# EAGLE board EasyAudiobookPlayer (EAGLE 7.7.0)
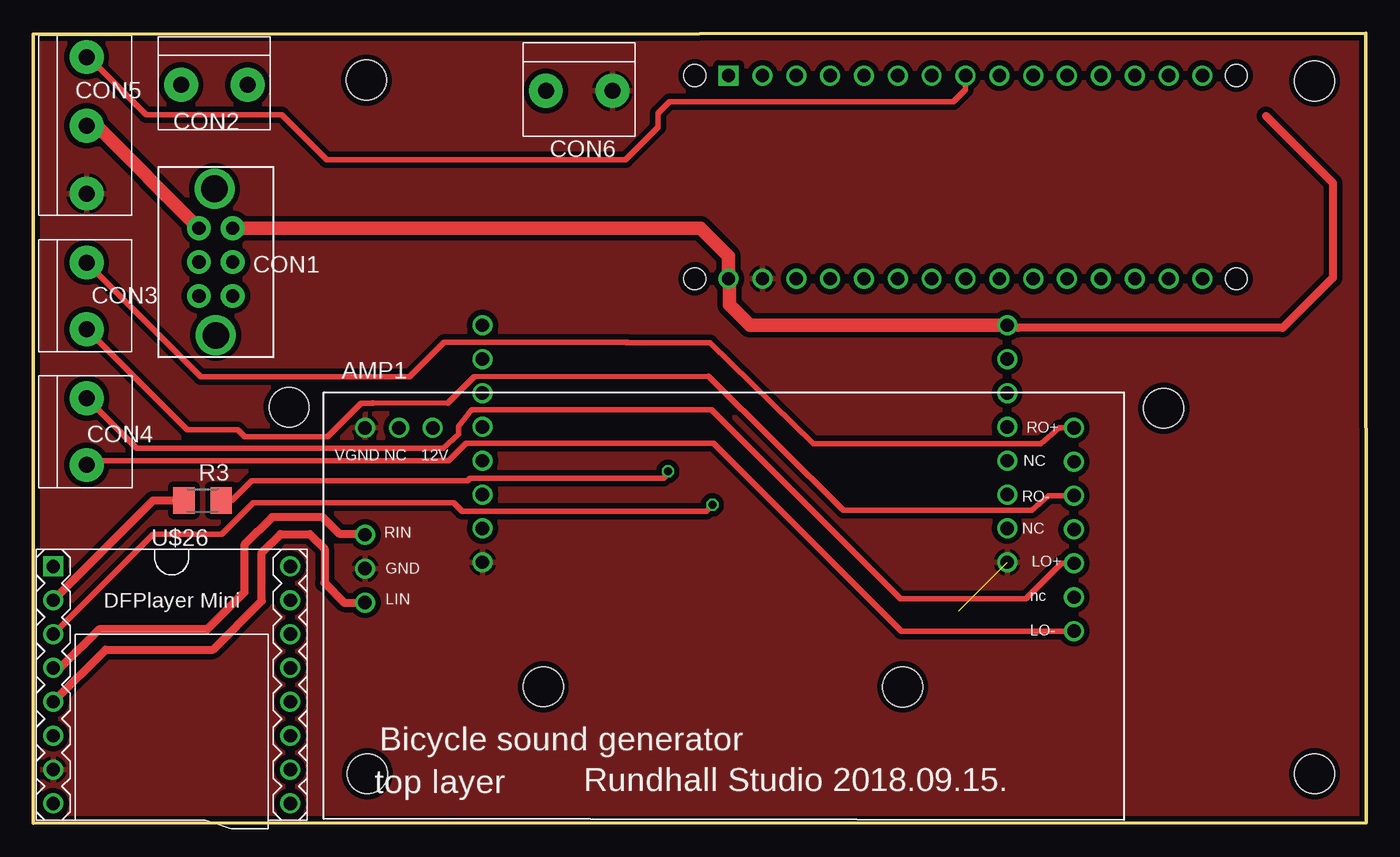
[diagram p0: board, top side]
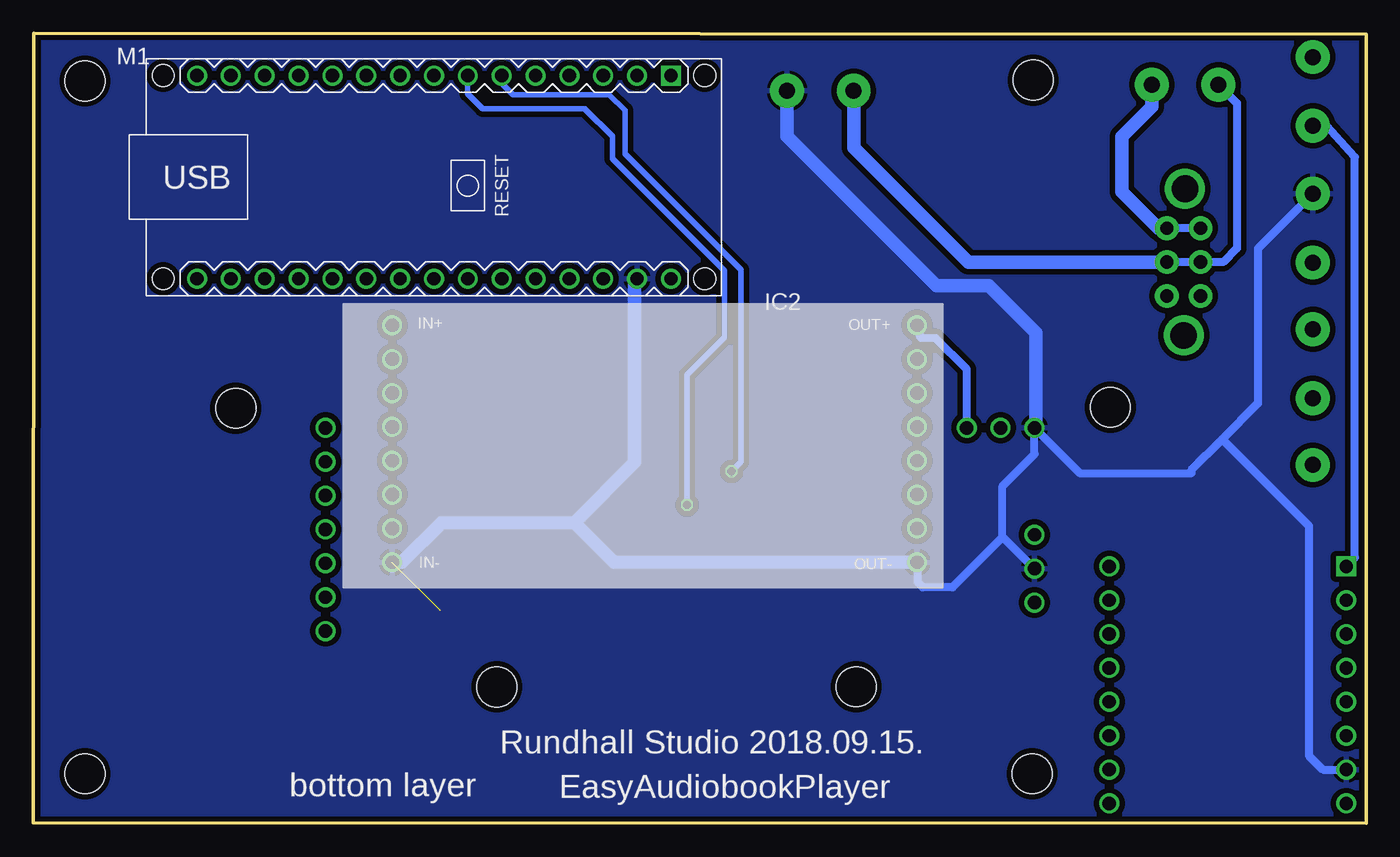
[diagram p1: board, bottom side, seen from below]

Size 100.02 x 59.26 mm. Coordinates in mm from the lower left corner, seen from the top.
Outline: 100.02,0.05 0,0 0.01,59.19 99.98,59.26 100.02,0.05
Copper layers (1*2*15*16): Top 0.035mm / dielectric 0.2mm / Route2 0.0175mm / dielectric 0.3mm / Route15 0.0175mm / dielectric 0.2mm / Bottom 0.035mm
Design rules "SeeedStudio_4layer_DRU_no_angle_20140221": minimum track width 8mil, minimum drill 12mil, track to track 8mil, track to pad 8mil, pad to pad 8mil, via to via 8mil, smd to smd 0mil, copper to edge 10mil, drill to drill 8mil, minimum pad ring 6mil, minimum via ring 4mil, stop-mask expansion 4mil, vias tented up to drill 25mil, thermal gap 10mil
Net classes: 0 default: width 0.203 mm, drill 0.406 mm, clearance 0.203 mm; 1 power: width 0.61 mm, drill 0.711 mm, clearance 0.203 mm; 2 gnd: width 0.305 mm, drill 0.711 mm, clearance 0.203 mm; 3 usbvcc: width 0.508 mm, drill 0.711 mm, clearance 0.203 mm
Holes 3 mm at 19.19,31.21 24.99,55.75 84.82,31.13 96.13,55.68 38.27,10.25 65.24,10.23 96.13,55.68 96.13,3.71 25.07,3.71

## Footprints (pad centres in the part's own frame; a part is rotated, then mirrored left to right if it is on the bottom)
AMPLIFIER_BOARD_80W = drill 1: 12V 40.73,-14.64; GND 45.81,-4.08; LIN 45.81,-1.54; LO+ -7.39,-4.48; LO- -7.39,0.6; NC1 -7.39,-12.1; NC2 -7.39,-7.02; NC3 -7.39,-1.94; NC4 43.27,-14.64; RIN 45.81,-6.62; RO+ -7.39,-14.64; RO- -7.39,-9.56; VGND 45.81,-14.64
SS-22F04_MINI_SLIDE_SWITCH = drill 1 pad 1.778: I1_1 -1.27,0; I2_1 1.27,0; O1_2 -1.27,2.54; O1_3 -1.27,-2.54; O2_2 1.27,2.54; O2_3 1.27,-2.54 | drill 2: P$7 -0.1,5.5; P$8 0,-5.5
1X2_5MM_TERMINAL_BLOCK = drill 1.2 pad 2.54: 1 3.3,0; 2 -1.7,0
1X3_5MM_TERMINAL_BLOCK = drill 1.2 pad 2.54: 1 -4.32,0; 2 0.84,0; 3 5.92,0
XL6009_STEP_UP_CONVERTER_MODULE = drill 1: IN+ -20.32,7.62; IN- -20.32,-10.16; N1 -20.32,5.08; N2 -20.32,2.54; N3 -20.32,0; N4 -20.32,-2.54; N5 -20.32,-5.08; N6 -20.32,-7.62; N7 19.05,5.08; N8 19.05,2.54; N9 19.05,0; N10 19.05,-2.54; N11 19.05,-5.08; N12 19.05,-7.62; OUT+ 19.05,7.62; OUT- 19.05,-10.16
ARDUINO-NANO-3.0 = drill 1 square: J1.1 17.78,7.62 | drill 1: J1.2 15.24,7.62; J1.3 12.7,7.62; J1.4 10.16,7.62; J1.5 7.62,7.62; J1.6 5.08,7.62; J1.7 2.54,7.62; J1.8 0,7.62; J1.9 -2.54,7.62; J1.10 -5.08,7.62; J1.11 -7.62,7.62; J1.12 -10.16,7.62; J1.13 -12.7,7.62; J1.14 -15.24,7.62; J1.15 -17.78,7.62; J2.1 17.78,-7.62; J2.2 15.24,-7.62; J2.3 12.7,-7.62; J2.4 10.16,-7.62; J2.5 7.62,-7.62; J2.6 5.08,-7.62; J2.7 2.54,-7.62; J2.8 0,-7.62; J2.9 -2.54,-7.62; J2.10 -5.08,-7.62; J2.11 -7.62,-7.62; J2.12 -10.16,-7.62; J2.13 -12.7,-7.62; J2.14 -15.24,-7.62; J2.15 -17.78,-7.62 | hole 1.651: -20.32,7.62; -20.32,-7.62; 20.32,-7.62; 20.32,7.62
M1206 = smd 1.6 x 2: 1 -1.4,0; 2 1.4,0
DFPLAYER-MINI-MODULE = drill 1 square: 1 -8.89,-8.89 | drill 1: 2 -6.35,-8.89; 3 -3.81,-8.89; 4 -1.27,-8.89; 5 1.27,-8.89; 6 3.81,-8.89; 7 6.35,-8.89; 8 8.89,-8.89; 9 8.89,8.89; 10 6.35,8.89; 11 3.81,8.89; 12 1.27,8.89; 13 -1.27,8.89; 14 -3.81,8.89; 15 -6.35,8.89; 16 -8.89,8.89

## Placement (x,y rotation side)
AMP1  AMPLIFIER_BOARD_80W  [AMPLIFIER_BOARD_80W]  70.7,15.02 180 top
CON1  SS-22F04_MINI_SLIDE_SWITCH  [SS-22F04_MINI_SLIDE_SWITCH]  13.69,42.1 0 top
CON2  [1X2_5MM_TERMINAL_BLOCK]  14.39,55.41 180 top
CON3  [1X2_5MM_TERMINAL_BLOCK]  3.99,40.36 270 top
CON4  [1X2_5MM_TERMINAL_BLOCK]  4,30.18 270 top
CON5  [1X3_5MM_TERMINAL_BLOCK]  4,53.16 270 top
CON6  [1X2_5MM_TERMINAL_BLOCK]  41.76,54.94 180 top
IC2  [XL6009_STEP_UP_CONVERTER_MODULE]  52.76,29.74 0 bottom
M1  ARDUINO-NANO-3.0  [ARDUINO-NANO-3.0]  69.95,48.47 0 bottom
R3  1kohm  [M1206]  12.7,24.22 180 top
U$26  DFPLAYER-MINI-MODULE  [DFPLAYER-MINI-MODULE]  10.39,10.38 270 top

## Library data of the parts
AMP1 CON1-CON6 IC2 = custom_petranyi
M1 U$26 = diy-modules
R3 = rcl

## Nets
3V3: M1.J2.14
5V: M1.J2.4
+5V [usbvcc]: CON1.O1_2 CON1.O2_2 CON2.2 CON5.2 IC2.IN+ M1.J2.1 U$26.1
+12V [usbvcc]: AMP1.12V IC2.OUT+
GND [gnd]: AMP1.GND AMP1.VGND CON5.3 CON6.2 IC2.IN- IC2.OUT- M1.J2.2 U$26.7
GND.1: M1.J1.4
GND.2: U$26.10
N$3: CON1.I1_1 CON1.I2_1 CON2.1 CON6.1
N$5: AMP1.RO+ CON3.2
N$6: AMP1.RO- CON3.1
N$7: AMP1.LO+ CON4.2
N$8: AMP1.LO- CON4.1
N$9: M1.J1.6 R3.1
N$10: R3.2 U$26.2
N$11: M1.J1.7 U$26.3
N$12: AMP1.RIN U$26.4
N$13: AMP1.LIN U$26.5
N$14: CON5.1 M1.J1.8

## Tracks (layer width: path | path; a pad name or v marks a point on that pad's centre or on a via)
+5V
  Top 0.61: 92.5,53.04 97.51,48.03 97.51,40.92 93.75,37.16 73.88,37.16 IC2.IN+
  Top 1.016: CON5.2 4.74,52.32 CON1.O1_2 | CON1.O2_2 50.05,44.64 52.15,42.55 52.15,40.87 M1.J2.1 52.22,40.8 52.22,38.91 53.78,37.35 IC2.IN+
  Bottom 0.61: U$26.1 0.84,19.93 0.84,49.99 2.94,52.32 CON5.2 | CON1.O1_2 CON1.O2_2
  Bottom 1.016: CON2.2 16.09,53.76 18.34,51.51 18.34,47.38 15.6,44.64 CON1.O2_2
+12V
  Bottom 0.61: AMP1.12V 29.97,34.06 32.31,36.4 33.41,36.4 IC2.OUT+
GND  (1 unrouted)
  Bottom 0.406: AMP1.GND 25.34,19.55
  Bottom 0.61: U$26.7 3.24,4.03 4.29,5.08 4.29,22.32 4.31,22.32 10.81,28.82 | AMP1.GND 27.28,21.49 | 27.28,21.49 27.28,25.3 24.89,27.69 AMP1.VGND 21.49,26.26 13.11,26.26 13.11,26.52 10.81,28.82 | CON5.3 8.13,43.11 8.13,31.5 10.81,28.82 | 34.19,19.57 IC2.OUT- 33.66,19.52 33.66,18.09 33.27,17.7 31.04,17.7 27.28,21.46 27.28,21.49
  Bottom 1.016: CON6.2 43.46,51.53 32.26,40.34 28.32,40.34 24.79,36.8 24.79,29.76 AMP1.VGND | IC2.IN- 72.37,19.57 69.39,22.55 59.41,22.55 | 59.41,22.55 54.89,27.08 54.89,40.67 M1.J2.2 | 34.19,19.57 56.43,19.57 59.41,22.55
  pour Bottom (isolate 0.406): 0.49,58.56 99.56,58.77 99.39,0.45 0.57,0.52
  pour Top (isolate 0.406): 99.56,58.77 99.87,0.42 0.57,0.52 0.49,58.56
N$3
  Bottom 0.61: CON2.1 9.7,54.02 9.7,43.13 10.73,42.1 CON1.I1_1 CON1.I2_1
  Bottom 1.016: CON1.I2_1 29.86,42.1 38.43,50.67 38.43,54.91 CON6.1
N$5
  Top 0.406: CON3.2 12.55,33.5 28.22,33.5 30.81,36.09 44.45,36.09 | 44.45,36.09 44.6,36.09 | AMP1.RO+ 77.01,29.66 75.62,28.47 58.55,28.47 50.77,36.04 44.5,36.04 44.45,36.09
N$6
  Top 0.406: CON3.1 11.54,29.52 15.34,29.52 15.85,29.01 22.1,29.01 24.61,31.52 25.45,31.52 25.48,31.55 31.09,31.52 33.07,33.5 50.65,33.53 60.78,23.47 74.93,23.47 76.17,24.58 AMP1.RO-
N$7
  Top 0.406: CON4.2 7.76,28.12 30.76,28.12 31.9,29.18 31.9,29.77 32.89,31.01 50.9,31.01 65.08,16.84 74.5,16.84 77.16,19.5 AMP1.LO+
N$8
  Top 0.406: CON4.1 4.3,27.18 31.17,27.18 32.49,28.5 51.05,28.5 65.13,14.42 AMP1.LO-
N$9  (via drill 0.6)
  Top 0.406: R3.1 14.93,24.22 16.38,25.68 32.59,25.68 32.79,25.88 47.3,25.88 47.62,26.21 v47.62,26.39
  Bottom 0.406: M1.J1.6 64.87,55.52 64.01,54.66 56.82,54.66 55.63,53.47 55.63,50.22 46.91,41.5 46.91,27.13 47.62,26.42 v47.62,26.39
N$10
  Top 0.61: U$26.2 8.99,24.22 R3.2
N$11  (via drill 0.6)
  Top 0.406: U$26.3 9,21.69 14.15,21.69 16.51,24.05 31.55,24.05 32.18,23.42 50.49,23.42 v50.95,23.88
  Bottom 0.406: M1.J1.7 67.41,54.71 66.29,53.59 58.6,53.59 58.6,53.57 56.57,51.54 56.57,49.86 48.13,41.43 48.13,36.47 50.95,33.66 v50.95,23.88
N$12
  Top 0.61: AMP1.RIN 24.84,21.69 22.99,21.69 21.72,22.96 17.91,22.96 15.82,20.88 15.82,17.32 13.06,14.55 4.93,14.55 2.02,11.65 U$26.4
N$13
  Top 0.61: U$26.5 5.42,13.03 13.49,13.03 17.14,16.69 17.14,20.3 18.54,21.69 20.75,21.69 21.84,20.6 21.84,18.03 23.32,16.56 AMP1.LIN
N$14
  Top 0.406: M1.J1.8 69.95,55.04 69.04,54.13 47.75,54.13 46.89,53.26 46.89,52.2 44.45,49.76 22,49.78 18.62,53.16 8.48,53.14 4.14,57.48 CON5.1

## Text on the board
tNames: Bicycle sound generator | top layer | Rundhall Studio 2018.09.15.
bNames: Rundhall Studio 2018.09.15. | EasyAudiobookPlayer | bottom layer